# Altium PCB MACHKICHVAN.PcbDoc
Units mm, origin at the board's own origin, x right, y up, seen from the top; angles counter-clockwise.
Board outline 40 x 50 mm, 2 copper layers (Top Layer, Bottom Layer); 41 components, 44 nets, 167 pads, 8 vias.
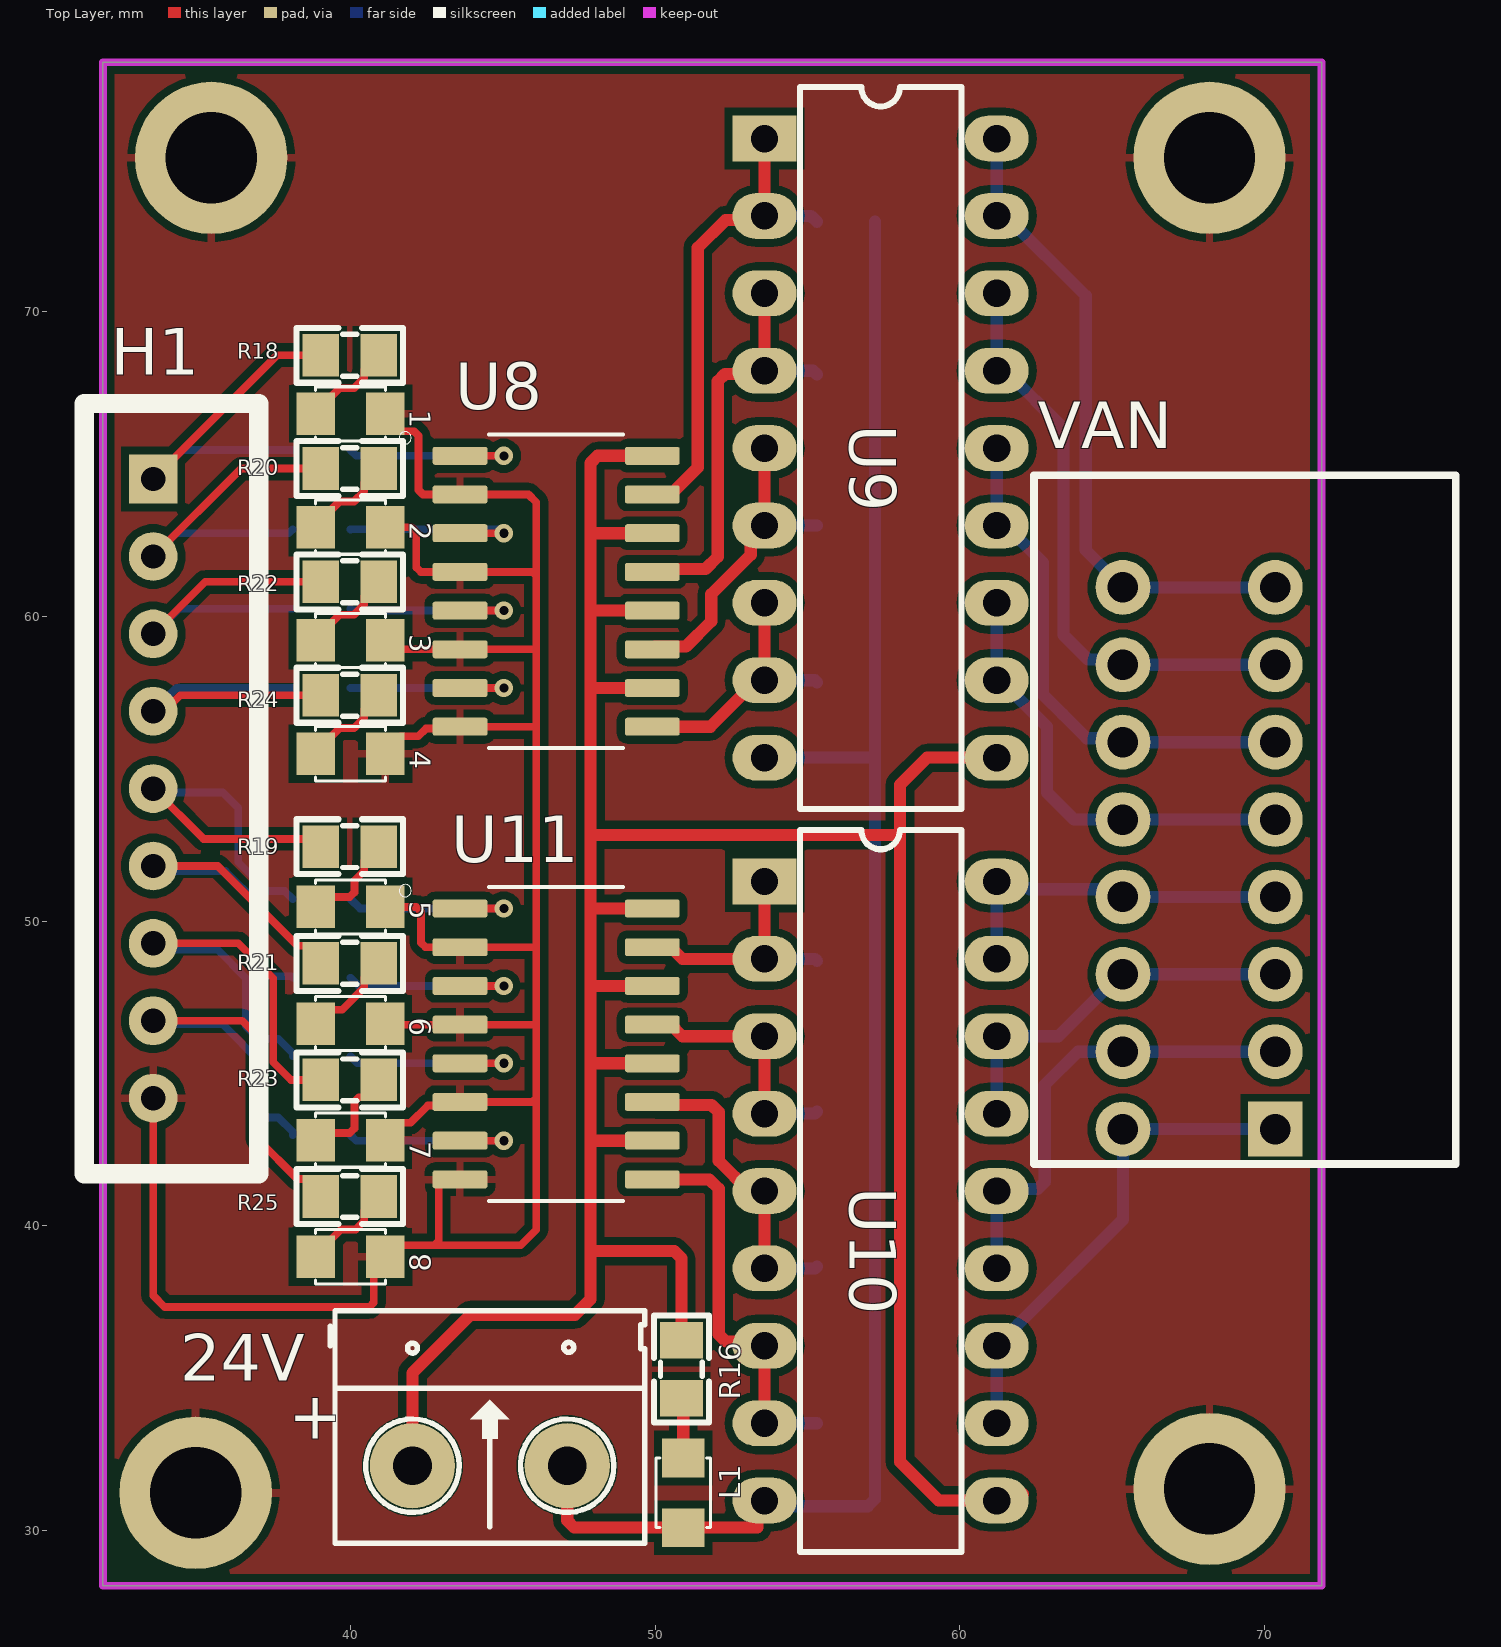
[diagram p0: Top Layer view]
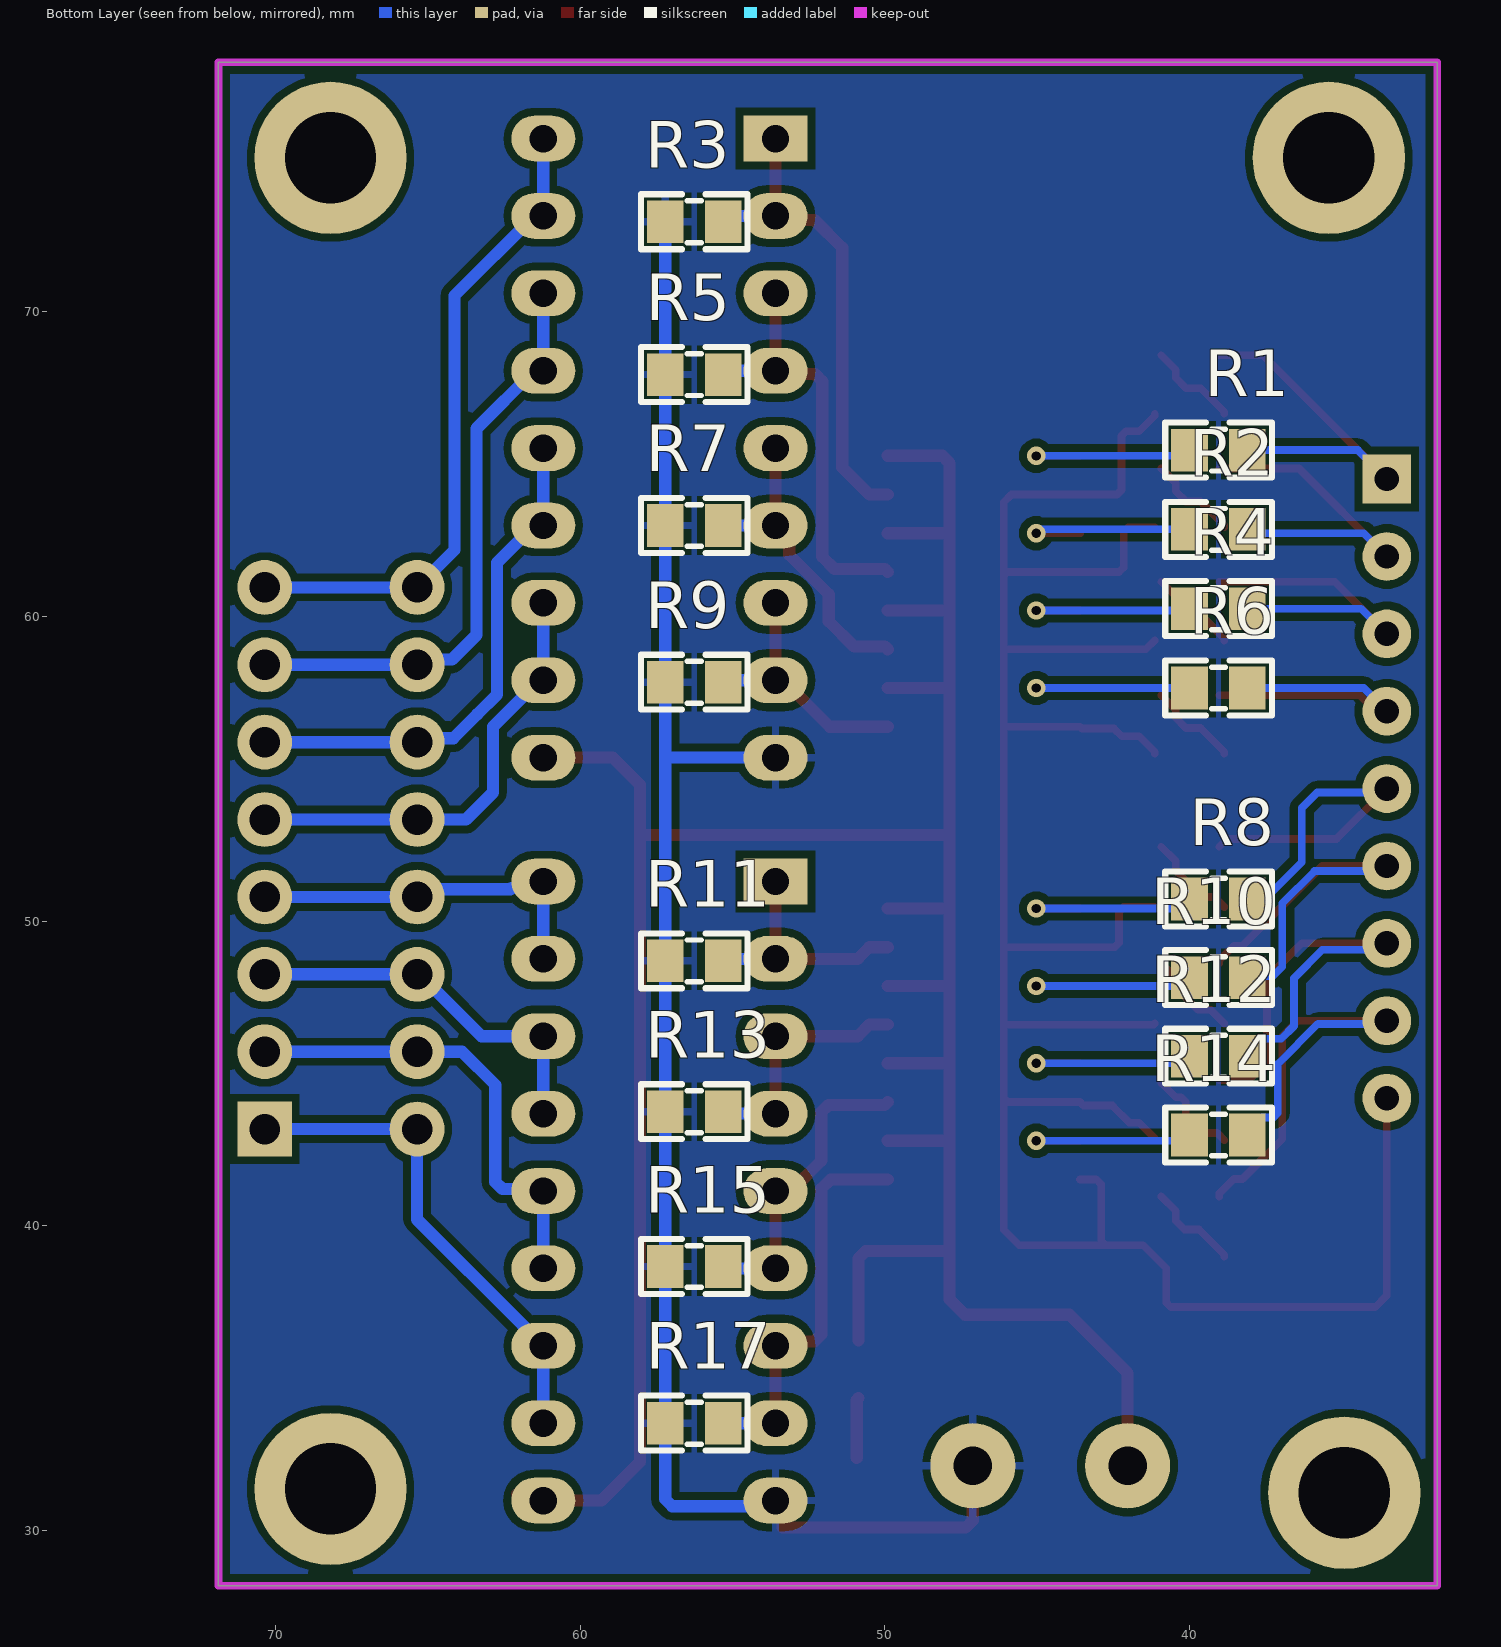
[diagram p1: Bottom Layer view, seen from below]
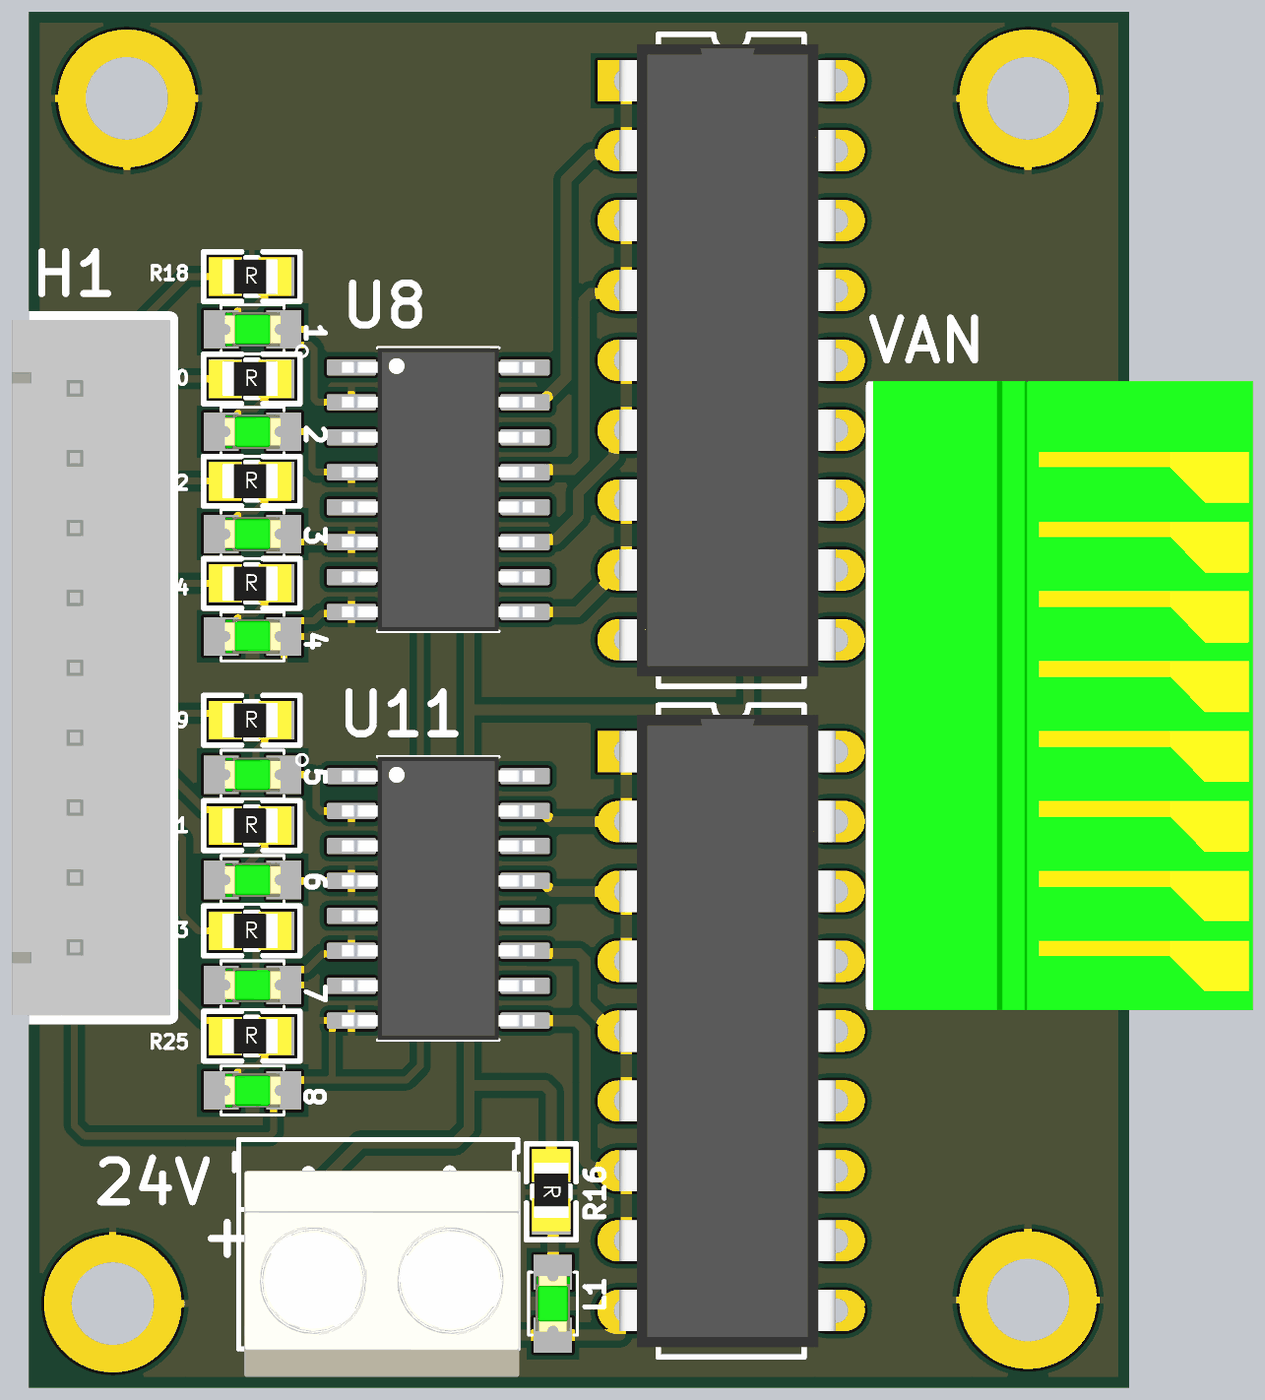
[diagram p2: 3D render of the assembled board from above, using the file's embedded part models]
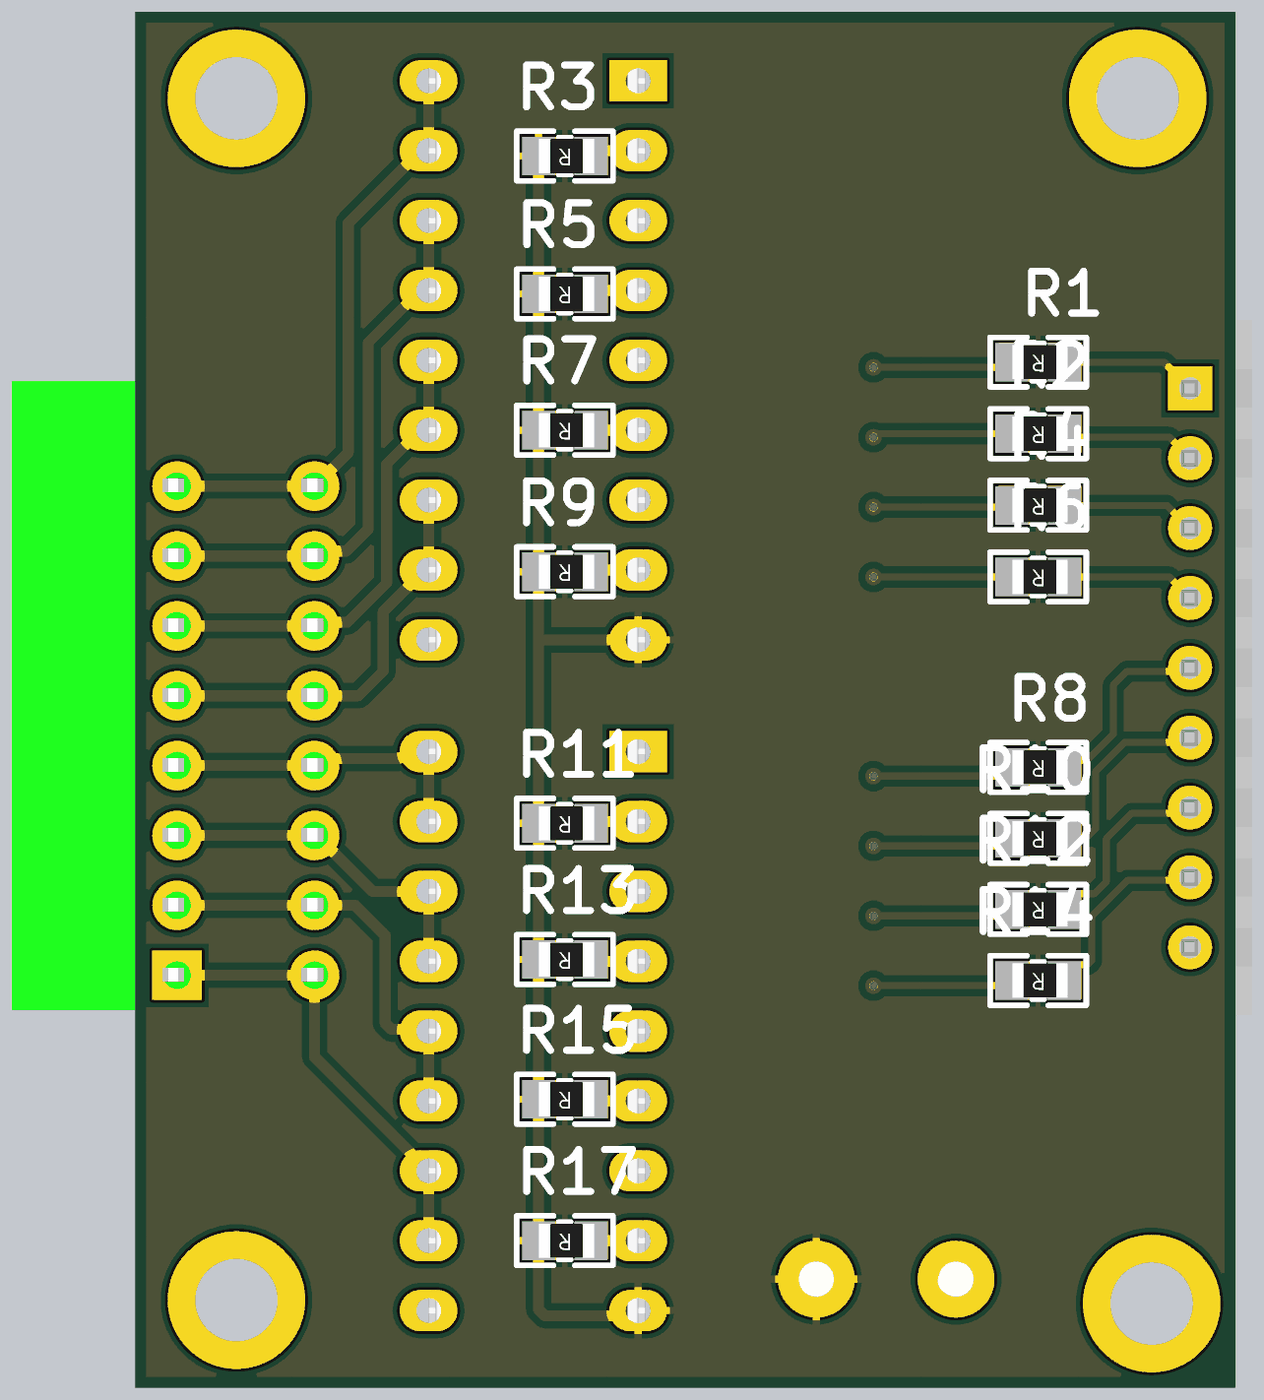
[diagram p3: 3D render of the assembled board from below, using the file's embedded part models]

## Layer stack, top to bottom
Top Solder: solder mask 0.0102, Solder Resist, Dk 3.5
Top Layer: signal copper 0.0356
Dielectric 1: dielectric 0.32, FR-4, Dk 4.8
Bottom Layer: signal copper 0.0356
Bottom Solder: solder mask 0.0102, Solder Resist, Dk 3.5

## Board outline
31.877,28.194 31.877,78.194 71.877,78.194 71.877,28.194

## Design rules (kind name [scope] priority, off if disabled: settings)
Clearance [All] p1: gap=0.254 ignorepadtopadclearanceinfootprint=FALSE except(0: Arc-Hole Track-Hole SMDPad-Hole THPad-Hole Via-Hole Fill-Hole Poly-Hole Region-Hole Text-Hole)
PolygonConnect [All] p1: connectstyle=Relief reliefconductorwidth=0.254 reliefentries=4 polygonreliefangle="90 Angle" airgapwidth=0.254
RoutingVias [All] p1: holewidth=0.3 width=0.6 viastyle="Through Hole" minholewidth=0.3 minwidth=0.6 maxholewidth=0.3 maxwidth=0.6
SolderMaskExpansion [All] p1: expansion=0.102 istentingtop=FALSE
Width Width_3 [InNet('VBAT')] p1: maxlimit=0.6 minlimit=0.4 preferedwidth=0.5
Width Width_2 [InNet('GNDCS')] p2: maxlimit=0.6 minlimit=0.4 preferedwidth=0.5
Width Width_1 [InNet('GNDBAT')] p3: maxlimit=0.6 minlimit=0.4 preferedwidth=0.4
Width [InNetClass('New Class')] p4: maxlimit=0.5 minlimit=0.4 preferedwidth=0.4
30 further rules are at their usual default settings.

## Components (designator, comment, footprint, x,y, rotation, side; value= is the part's Value field where it differs from the comment)
1 "LED 0805" LED-0805-Green 38.862,66.656 r0 top (schematic designator L2)
2 "LED 0805" LED-0805-Green 38.862,62.937 r0 top (schematic designator L4)
3 "LED 0805" LED-0805-Green 38.862,55.499 r0 top (schematic designator L8)
4 "LED 0805" LED-0805-Green 38.862,59.218 r0 top (schematic designator L6)
5 "LED 0805" LED-0805-Green 38.862,50.472 r0 top (schematic designator L3)
6 "LED 0805" LED-0805-Green 38.862,46.645 r0 top (schematic designator L5)
7 "LED 0805" LED-0805-Green 38.862,42.817 r0 top (schematic designator L7)
8 "LED 0805" LED-0805-Green 38.862,38.989 r0 top (schematic designator L9)
24V "Header 2" HED2 42.037,32.131 r0 top
H1 "XH-2.54-9P" XH2.54M-9 33.528,64.516 r270 top locked
L1 "LED 0805" LED-0805-Green 50.927,32.385 r270 top
R1 "330R" "Tro SMD 0805" 39.051,65.405 r0 bottom
R2 "330R" "Tro SMD 0805" 39.051,62.802 r0 bottom
R3 "4.7k" "tro smd 0805" 56.261,72.898 r0 bottom
R4 "330R" "Tro SMD 0805" 39.051,60.2 r0 bottom
R5 "4.7k" "tro smd 0805" 56.261,67.884 r0 bottom
R6 "330R" "Tro SMD 0805" 39.051,57.597 r0 bottom
R7 "4.7k" "tro smd 0805" 56.261,62.931 r0 bottom
R8 "330R" "Tro SMD 0805" 39.051,50.673 r0 bottom
R9 "4.7k" "tro smd 0805" 56.261,57.785 r0 bottom
R10 "330R" "Tro SMD 0805" 39.051,48.091 r0 bottom
R11 "4.7k" "tro smd 0805" 56.261,48.641 r0 bottom
R12 "330R" "Tro SMD 0805" 39.051,45.508 r0 bottom
R13 "4.7k" "tro smd 0805" 56.261,43.688 r0 bottom
R14 "330R" "Tro SMD 0805" 39.051,42.926 r0 bottom
R15 "4.7k" "tro smd 0805" 56.261,38.608 r0 bottom
R16 "1k" "tro smd 0805" 50.927,35.306 r270 top
R17 "4.7k" "tro smd 0805" 56.261,33.467 r0 bottom
R18 "1k" "tro smd 0805" 39.975,68.641 r0 top
R19 "1k" "tro smd 0805" 39.975,52.512 r0 top
R20 "1k" "tro smd 0805" 39.975,64.922 r0 top
R21 "1k" "tro smd 0805" 39.975,48.684 r0 top
R22 "1k" "tro smd 0805" 39.975,61.203 r0 top
R23 "1k" "tro smd 0805" 39.975,44.856 r0 top
R24 "1k" "tro smd 0805" 39.975,57.484 r0 top
R25 "1k" "tro smd 0805" 39.975,41.028 r0 top
U8 "TLP281-4GB(F)" SOIC127P700X210-16N 46.756,60.833 r0 top locked
U9 "ULN2803A_1" DIP18 57.404,65.532 r270 top
U10 "ULN2803A_1" DIP18 57.404,41.148 r270 top
U11 "TLP281-4GB(F)" SOIC127P700X210-16N 46.756,45.974 r0 top locked
VAN "8P" KF141_8P 70.358,43.18 r90 top value="DOMINO KF 8P" (schematic designator D1)

## Footprints (in the part's own frame and the unit in brackets; to place one, negate y for a bottom-side part, rotate by r counter-clockwise, add the part's x,y. Pads: shape width x height; smd on the part's side, far side on the other; paste and mask are expansions set on the pad)
DIP18 [mm] "DIP; 18 Leads; Row Spacing 7.62 mm; Pitch 2.54 mm"
  rect 1.5x2.1 hole 0.9: 1(-10.16,-3.81)
  oval 1.5x2.1 hole 0.9: 2(-7.62,-3.81) 3(-5.08,-3.81) 4(-2.54,-3.81) 5(0,-3.81) 6(2.54,-3.81) 7(5.08,-3.81) 8(7.62,-3.81) 9(10.16,-3.81) 10(10.16,3.81) 11(7.62,3.81) 12(5.08,3.81) 13(2.54,3.81) 14(0,3.81) 15(-2.54,3.81) 16(-5.08,3.81) 17(-7.62,3.81) 18(-10.16,3.81)
  silkscreen extent -11.85,-2.65 11.85,2.65, body extent -11.49,-4.06 11.5,3.81, height 5.08
HED2 [mil] "Header 2, 2 pin, hight 300mil, Pin to Pin 200, Colour Green"
  round 110 hole 50: 1(0,0) 2(200,0)
  silkscreen extent -106,-100 300,200, body extent -92,-140 302,155, height 394
KF141_8P [mm]
  rect 1.8x1.8 hole 1: 1(0,0)
  round 1.8 hole 1: 2(2.54,0) 3(5.08,0) 4(7.62,0) 5(10.16,0) 6(12.7,0) 7(15.24,0) 8(17.78,0) 9(17.78,5) 10(15.24,5) 11(12.7,5) 12(10.16,5) 13(7.62,5) 14(5.08,5) 15(2.54,5) 16(0,5)
  silkscreen extent -1.14,-5.92 21.46,7.92, body extent -1.27,-6.01 21.59,7.79, height 12.5
LED-0805-Green [mil]
  rect 50x55 smd: 1(0,0) 2(90,0)
  silkscreen extent 0,-35 90,35, body extent 5,-25 85,25, height 43
SOIC127P700X210-16N [mm]
  rrect25% 1.8x0.59 smd: 1(-3.155,4.445) 2(-3.155,3.175) 3(-3.155,1.905) 4(-3.155,0.635) 5(-3.155,-0.635) 6(-3.155,-1.905) 7(-3.155,-3.175) 8(-3.155,-4.445) 9(3.155,-4.445) 10(3.155,-3.175) 11(3.155,-1.905) 12(3.155,-0.635) 13(3.155,0.635) 14(3.155,1.905) 15(3.155,3.175) 16(3.155,4.445)
  silkscreen extent -5.15,-5.15 2.2,5.23, body extent -3.5,-5.15 3.5,5.15, height 2.1
"Tro SMD 0805" [mm]
  rect 1.2x1.4 smd: 1(-0.946,-0.061) 2(0.954,-0.061)
  silkscreen extent -1.75,-0.97 1.75,0.84, body extent -1.56,-0.76 1.44,0.64, height 0.53
"tro smd 0805" [mm]
  rect 1.2x1.4 smd: 1(-0.946,-0.061) 2(0.954,-0.061)
  silkscreen extent -1.75,-0.97 1.75,0.84, body extent -1.56,-0.76 1.44,0.64, height 0.53
XH2.54M-9 [mm]
  rect 1.6x1.6 hole 0.8: 1(0,0)
  round 1.6 hole 0.8: 2(2.54,0) 3(5.08,0) 4(7.62,0) 5(10.16,0) 6(12.7,0) 7(15.24,0) 8(17.78,0) 9(20.32,0)
  silkscreen extent -2.48,-2.26 22.8,3.46, body extent -2.48,-2.26 22.8,3.48, height 6.91

## Part data
1 2 3 4 5 6 7 8 L1: library part "LED 0805 Xanh La", "Dán", Chung_Loai=Dán, Don_Vi=Con, Ma_Hang=MH002326, Ten_Linh_Kien="LED 0805 Màu Xanh Lá (Green)"
24V: library part Hed2, "Header 2 (Green)"
R1 R2 R4 R6 R8 R10 R12 R14: library part "Tro 0805 5% 330R", "Dán", Chung_Loai=Dán, Don_Vi=Con, Ma_Hang=MH005337, So_Chan=2, Ten_Linh_Kien="Trở 0805 5% 330R"
R3 R5 R7 R9 R11 R13 R15 R17: library part "Tro 0805 5% 4.7k", "Dán", Chung_Loai=Dán, Don_Vi=Con, Ma_Hang=MH005307, So_Chan=2, Ten_Linh_Kien="Trở 0805 5% 4.7k"
R16: library part "Tro 0805 5% 1k", "Dán", Chung_Loai=Dán, Don_Vi=Con, Ma_Hang=MH005234, So_Chan=2, Ten_Linh_Kien="Trở 0805 5% 1k"
R18 R19 R20 R21 R22 R23 R24 R25: library part "Tro 0805 1% 1k", "Dán", Chung_Loai=Dán, Don_Vi=Con, Ma_Hang=MH005468, So_Chan=2, Ten_Linh_Kien="Trở 0805 1% 1k"
U8 U11: "Optocoupler DC-IN 4-CH Transistor DC-OUT 16-Pin SOP", Package="SOP-16 Toshiba", Check_prices=https://www.snapeda.com/parts/TLP281-4GB(F)/Toshiba/view-part/?ref=eda, MF=Toshiba, MP=TLP281-4GB(F), SnapEDA_Link=https://www.snapeda.com/parts/TLP281-4GB(F)/Toshiba/view-part/?ref=snap
U9 U10: "High-Voltage, High-Current Darlington Array", ComponentLink1Description="Manufacturer Link", ComponentLink1URL=http://www.allegromicro.com/, DatasheetVersion=1999, LatestRevisionDate=06-Jun-2005, LatestRevisionNote="Stylized 3D Model Added.", PackageDescription="DIP; 18 Leads; Row Spacing 7.62 mm; Pitch 2.54 mm", PackageReference=A18, PackageVersion=1999, Published=13-Oct-2000, Publisher="Altium Limited"
VAN: library part KF141_8P, "DOMINO 5.08MM"
H1: Chung_Loai=Cắm, Don_Vi=Con, Ma_Hang=MH003366, Ten_Linh_Kien="Header 8P XH2.54-8P Đực Thẳng"

## Free pads (board coordinates)
  round 5 hole 3: 2(34.925,31.242) 2(35.433,75.057) 2(68.199,31.369) 2(68.199,75.057)

## Via types
v1: diameter 0.6, hole 0.3, Top Layer to Bottom Layer, tented both sides, 8 vias

## Nets (pads, with @x,y where several pads share a name; then routed paths per layer and width w, separated by ;. In a path a pad name is that pad's centre, name@x,y a point inside that pad or via, vN(x,y) a via of type N, cw(c..) or ccw(c..) an arc to the next point about the centre after c; other vN are vias at no path point)
GND: 1.2 2.2 3.2 4.2 5.2 6.2 7.2 8.2 H1.9 pad.2 U8.2 U8.4 U8.6 U8.8 U11.2 U11.4 U11.6 U11.8 | length 88.2
  Top Layer w0.254: H1.9 33.528,37.719 33.909,37.338 40.618,37.338 40.767,37.487 40.767,38.608 8.2 41.529,39.37 42.753,39.37 ; 7.2 41.148,42.88 41.656,43.388 41.974,43.388 42.536,43.951 43.483,43.951 U11.6 45.974,44.069 46.101,44.196 ; 6.2 41.184,46.609 U11.4 46.101,46.609 ; 5.2 42.164,50.472 42.32,50.316 42.32,49.298 42.469,49.149 U11.2 46.101,49.149 ; 3.2 41.148,55.562 41.656,56.07 42.227,56.07 42.482,56.325 43.538,56.325 U8.8 46.038,56.388 46.101,56.451 ; 4.2 41.438,58.928 U8.6 46.101,58.928 ; 2.2 42.015,62.937 42.164,62.788 42.164,61.617 42.313,61.468 U8.4 45.974,61.468 46.101,61.341 ; 1.2 41.148,66.592 41.656,66.084 42.088,66.084 42.237,65.936 42.237,64.157 42.386,64.008 U8.2 45.847,64.008 46.101,63.754 46.101,61.341 ; U11.8 43.07,41.529 42.902,41.361 42.902,39.519 42.753,39.37 ; 42.753,39.37 45.593,39.37 46.101,39.878 46.101,44.196 ; 46.101,44.196 46.101,46.609 ; 46.101,46.609 46.101,49.149 ; 46.101,49.149 46.101,56.451 ; 46.101,56.451 46.101,58.928 ; 46.101,58.928 46.101,61.341
GNDCS: 24V.2 L1.2 R3.2 R5.2 R7.2 R9.2 R11.2 R13.2 R15.2 R17.2 U9.9 U10.9 | length 58.5
  Top Layer w0.4: 24V.2 47.117,30.333 47.351,30.099 L1.2 53.36,30.099 53.36,30.754 U10.9
  Bottom Layer w0.4: U10.9 53.783,30.799 56.981,30.799 57.215,31.034 R17.2 R15.2 R13.2 R11.2 57.215,55.372 ; U9.9 57.215,55.372 ; R3.2 R5.2 R7.2 R9.2 57.215,55.372
IN1: H1.1 R1.1 R18.1 | length 12.2
  Top Layer w0.254: H1.1 37.592,68.58 R18.1
  Bottom Layer w0.254: H1.1 34.478,65.466 R1.1
IN2: H1.2 R2.1 R20.1 | length 11.6
  Top Layer w0.254: H1.2 36.413,64.861 R20.1
  Bottom Layer w0.254: H1.2 34.29,62.738 37.98,62.738 R2.1
IN3: H1.3 R4.1 R22.1 | length 11.1
  Top Layer w0.254: H1.3 35.234,61.142 R22.1
  Bottom Layer w0.254: H1.3 33.549,59.436 34.374,60.261 R4.1
IN4: H1.4 R6.1 R24.1 | length 10.6
  Top Layer w0.254: H1.4 33.892,56.896 34.419,57.423 R24.1
  Bottom Layer w0.254: H1.4 34.29,57.658 R6.1
IN5: H1.5 R8.1 R19.1 | length 13.4
  Top Layer w0.254: H1.5 35.179,52.705 38.776,52.705 R19.1
  Bottom Layer w0.254: H1.5 33.654,54.23 35.813,54.23 36.322,53.721 36.322,51.943 37.273,50.992 37.847,50.992 R8.1
IN6: H1.6 R10.1 R21.1 | length 14.2
  Top Layer w0.254: H1.6 35.646,51.816 38.266,49.196 38.557,49.196 39.03,48.723 R21.1
  Bottom Layer w0.254: H1.6 33.697,51.647 35.899,51.647 36.957,50.59 36.957,48.514 37.273,48.198 38.058,48.198 R10.1
IN7: H1.7 R12.1 R23.1 | length 16.1
  Top Layer w0.254: H1.7 36.322,49.276 37.465,48.133 37.465,45.379 38.049,44.795 R23.1
  Bottom Layer w0.254: H1.7 33.739,49.065 35.644,49.065 36.576,48.133 36.576,46.565 36.999,46.142 37.632,46.142 38.105,45.669 R12.1
IN8: H1.8 R14.1 R25.1 | length 17.1
  Top Layer w0.254: H1.8 36.449,46.736 36.957,46.228 36.957,42.85 38.266,41.541 38.557,41.541 39.03,41.068 R25.1
  Bottom Layer w0.254: H1.8 33.632,46.632 35.791,46.632 37.109,45.314 37.109,43.709 37.257,43.56 37.632,43.56 38.105,43.087 R14.1
NetL1_1: L1.1 R16.2 | length 2
  Top Layer w0.4: R16.2 50.927,34.291 L1.1
NetL2_1: 1.1 R18.2 | length 3.1
  Top Layer w0.254: 1.1 38.862,66.719 39.642,67.499 40.119,67.499 40.457,67.837 40.457,68.107 R18.2
NetL3_1: 5.1 R19.2 | length 3.3
  Top Layer w0.254: 5.1 39.19,50.8 39.983,50.8 40.132,50.949 40.132,51.329 40.457,51.654 40.457,51.978 R19.2
NetL4_1: 2.1 R20.2 | length 3.1
  Top Layer w0.254: 2.1 38.862,63 39.642,63.78 40.119,63.78 40.457,64.118 40.457,64.388 R20.2
NetL5_1: 6.1 R21.2 | length 3.1
  Top Layer w0.254: 6.1 39.316,47.098 39.729,47.098 40.457,47.826 40.457,48.15 R21.2
NetL6_1: 4.1 R22.2 | length 3.1
  Top Layer w0.254: 4.1 38.862,59.281 39.642,60.061 40.119,60.061 40.457,60.399 40.457,60.669 R22.2
NetL7_1: 7.1 R23.2 | length 3.5
  Top Layer w0.254: 7.1 39.098,43.053 39.983,43.053 40.132,43.202 40.132,44.074 40.281,44.222 40.457,44.222 40.93,44.695 R23.2
NetL8_1: 3.1 R24.2 | length 3.1
  Top Layer w0.254: 3.1 38.862,55.562 39.642,56.342 40.119,56.342 40.457,56.68 40.457,56.95 R24.2
NetL9_1: 8.1 R25.2 | length 3.1
  Top Layer w0.254: 8.1 38.862,39.052 39.696,39.887 40.173,39.887 40.457,40.17 40.457,40.495 R25.2
NetR1_2: R1.2 U8.1 | length 6.6
  Top Layer w0.254: U8.1 v1@45.085,65.278
  Bottom Layer w0.254: R1.2 40.193,65.278 v1@45.085,65.278
  other v1: 45.037,65.278
NetR2_2: R2.2 U8.3 | length 6.6
  Top Layer w0.254: U8.3 v1@45.085,62.738
  Bottom Layer w0.254: R2.2 40.007,62.865 44.864,62.865 v1@44.991,62.738 ; v1@44.864,62.738 v1@44.958,62.738
  other v1: 45.037,62.738
NetR4_2: R4.2 U8.5 | length 6.6
  Top Layer w0.254: U8.5 v1@45.085,60.198
  Bottom Layer w0.254: R4.2 40.068,60.198 v1@45.085,60.198
  other v1: 45.037,60.198
NetR6_2: R6.2 U8.7 | length 6.6
  Top Layer w0.254: U8.7 v1@45.085,57.658
  Bottom Layer w0.254: R6.2 v1@45.085,57.658
  other v1: 45.037,57.658
NetR8_2: R8.2 U11.1 | length 6.7
  Top Layer w0.254: U11.1 v1@45.085,50.419
  Bottom Layer w0.254: R8.2 40.32,50.419 v1@45.085,50.419
  other v1: 45.037,50.419
NetR10_2: R10.2 U11.3 | length 6.7
  Top Layer w0.254: U11.3 v1@45.085,47.879
  Bottom Layer w0.254: R10.2 40.277,47.879 v1@45.085,47.879
  other v1: 45.037,47.879
NetR12_2: R12.2 U11.5 | length 6.7
  Top Layer w0.254: U11.5 v1@45.085,45.339
  Bottom Layer w0.254: R12.2 40.235,45.339 v1@45.085,45.339
  other v1: 45.037,45.339
NetR14_2: R14.2 U11.7 | length 6.6
  Top Layer w0.254: U11.7 v1@45.085,42.799
  Bottom Layer w0.254: R14.2 40.193,42.799 v1@45.085,42.799
  other v1: 45.037,42.799
OUT1: R3.1 U8.15 U9.1 U9.2 | length 16
  Top Layer w0.4: U8.15 50.516,64.008 51.405,64.897 51.405,72.106 52.318,73.019 53.461,73.019 U9.2 U9.1
  Bottom Layer w0.4: U9.2 55.122,73.152 R3.1
OUT2: R5.1 U8.13 U9.3 U9.4 | length 14.1
  Top Layer w0.4: U8.13 50.003,61.56 51.654,61.56 52.059,61.965 52.059,67.729 52.293,67.964 53.486,67.964 U9.4 U9.3
  Bottom Layer w0.4: U9.4 55.188,68.072 R5.1
OUT3: R7.1 U8.11 U9.5 U9.6 | length 10.7
  Top Layer w0.254: U9.6@53.04,63.246 U9.6@53.34,63.246
  Top Layer w0.4: U8.11 50.003,59.02 51.019,59.02 51.847,59.848 51.847,60.737 53.143,62.033 53.143,62.541 U9.6 U9.5
  Bottom Layer w0.4: U9.6 R7.1
OUT4: R9.1 U8.9 U9.7 U9.8 | length 8.6
  Top Layer w0.4: U8.9 51.816,56.388 53.34,57.912 U9.8 U9.7
  Bottom Layer w0.4: U9.8 55.249,57.912 R9.1
OUT5: R11.1 U10.1 U10.2 U11.15 | length 8.1
  Top Layer w0.4: U11.15 50.516,49.149 50.897,48.768 U10.2 U10.1
  Bottom Layer w0.4: U10.2 55.249,48.768 R11.1
OUT6: R13.1 U10.3 U10.4 U11.13 | length 8.1
  Top Layer w0.4: U11.13 50.516,46.609 50.897,46.228 U10.3 U10.4
  Bottom Layer w0.4: U10.4 55.255,43.688 R13.1
OUT7: R15.1 U10.5 U10.6 U11.11 | length 10.1
  Top Layer w0.4: U11.11 50.006,43.974 51.856,43.974 52.09,43.74 52.09,42.144 53.086,41.148 U10.5 U10.6
  Bottom Layer w0.4: U10.6 55.255,38.608 R15.1
OUT8: R17.1 U10.7 U10.8 U11.9 | length 13
  Top Layer w0.4: U11.9 51.78,41.529 52.09,41.219 52.09,36.442 52.324,36.207 53.455,36.207 U10.7 U10.8
  Bottom Layer w0.4: U10.8 R17.1
VAN1: U9.17 U9.18 VAN.8 VAN.9 | length 21.6
  Bottom Layer w0.4: U9.18 U9.17 61.514,73.152 64.135,70.531 64.135,62.183 VAN.9 VAN.8
VAN2: U9.15 U9.16 VAN.7 VAN.10 | length 19.7
  Bottom Layer w0.4: U9.16 U9.15 61.514,68.072 63.407,66.179 63.407,59.402 64.213,58.596 65.182,58.596 VAN.10 VAN.7
VAN3: U9.13 U9.14 VAN.6 VAN.11 | length 17.2
  Bottom Layer w0.4: U9.14 U9.13 61.514,62.992 62.738,61.768 62.738,57.44 63.384,56.794 64.167,56.011 65.227,56.011 VAN.11 VAN.6
VAN4: U9.11 U9.12 VAN.5 VAN.12 | length 14.8
  Bottom Layer w0.4: U9.12 U9.11 61.341,57.912 62.865,56.388 62.865,54.229 63.754,53.34 VAN.5
VAN5: U10.17 U10.18 VAN.4 VAN.13 | length 11.9
  Bottom Layer w0.4: U10.17 U10.18 61.424,51.098 62.255,51.098 62.298,51.054 65.104,51.054 VAN.13 VAN.4
VAN6: U10.15 U10.16 VAN.3 VAN.14 | length 12.5
  Bottom Layer w0.4: U10.15 U10.16 63.246,46.228 65.278,48.26 VAN.3
VAN7: U10.13 U10.14 VAN.2 VAN.15 | length 15.4
  Bottom Layer w0.4: U10.13 U10.14 61.279,41.213 62.558,41.213 62.793,41.447 62.793,44.632 63.881,45.72 VAN.15 VAN.2
VAN8: U10.11 U10.12 VAN.1 VAN.16 | length 16.4
  Bottom Layer w0.4: U10.11 U10.12 61.216,36.068 61.919,36.77 61.919,36.773 65.358,40.212 VAN.16 VAN.1
VBAT: 24V.1 R16.1 U8.10 U8.12 U8.14 U8.16 U9.10 U10.10 U11.10 U11.12 U11.14 U11.16 | length 100.3
  Top Layer w0.4: 24V.1 42.037,35.179 43.942,37.084 47.371,37.084 47.879,37.592 47.879,39.243 ; U11.10 48.006,42.799 47.879,42.672 ; U11.12 48.006,45.339 47.879,45.466 ; U11.14 48.006,47.879 47.879,48.006 ; U11.16 47.879,50.419 ; U8.10 48.006,57.658 47.879,57.531 ; U8.12 47.879,60.198 ; U8.14 47.879,62.738 ; U8.16 48.113,65.278 47.879,65.044 47.879,62.738 ; R16.1 50.866,38.942 50.632,39.177 47.945,39.177 47.879,39.243 ; U9.10 58.928,55.372 58.039,54.483 58.039,52.832 ; U10.10@62.073,31.198 61.424,31.198 U10.10 59.309,30.988 58.039,32.258 58.039,52.832 ; 47.879,39.243 47.879,42.672 ; 47.879,42.672 47.879,45.466 ; 47.879,45.466 47.879,48.006 ; 47.879,48.006 47.879,50.419 ; 47.879,50.419 47.879,52.832 ; 47.879,52.832 58.039,52.832 ; 47.879,52.832 47.879,57.531 ; 47.879,57.531 47.879,60.198 ; 47.879,60.198 47.879,62.738

## Polygon pours and split planes (outlines as drawn)
GND on Top Layer "GND_L01_P000" (solid, pour order 0): 31.877,78.232 71.882,78.232 71.882,28.194 31.877,28.194
GNDCS on Bottom Layer "GNDCS_L02_P001" (solid, pour order 1): 31.877,78.232 71.882,78.232 71.882,28.194 31.877,28.194

## Keep-outs
Keep-Out Layer:
  the board outline again, w0.254

## Silkscreen, mask and mechanical layers (free items; w line width, h text height)
Top Overlay:
  text "+" at 37.973,33.02 h1.52